# Altium PCB PCB1.PcbDoc
Units mil, origin at the board's own origin, x right, y up, seen from the top; angles counter-clockwise.
Board outline 2000 x 625 mil, 2 copper layers (Top SIGNAL, Bottom SIGNAL), stack 61.8 mil thick; 39 components, 37 nets, 177 pads, 39 vias.
Unrouted connection lines stored in the file: 3.
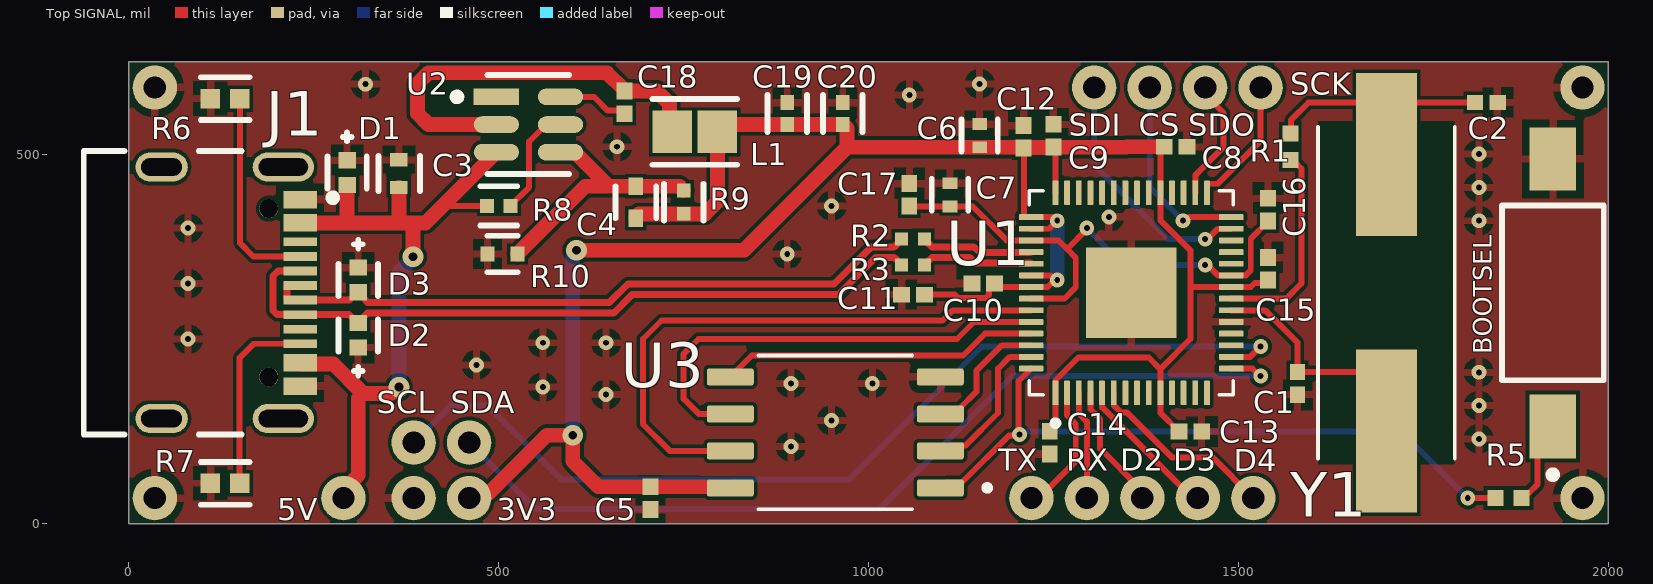
[diagram p0: Top SIGNAL view]
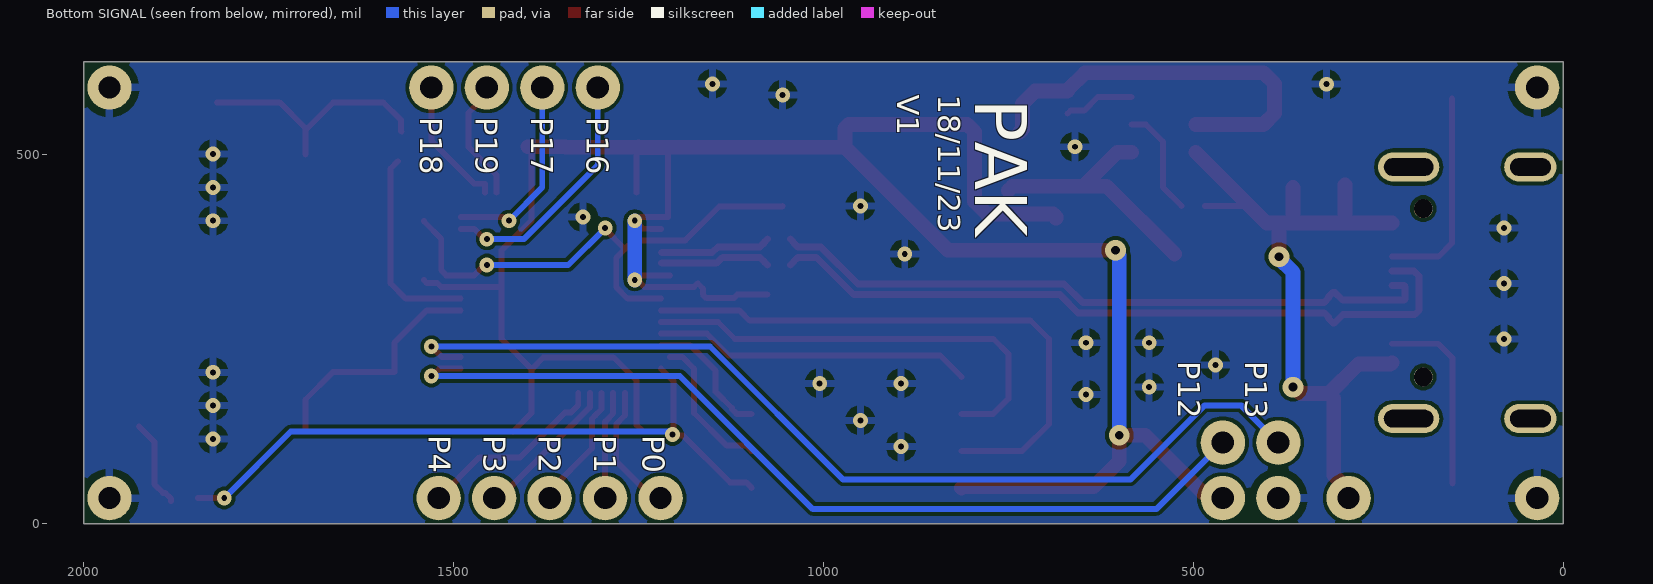
[diagram p1: Bottom SIGNAL view, seen from below]
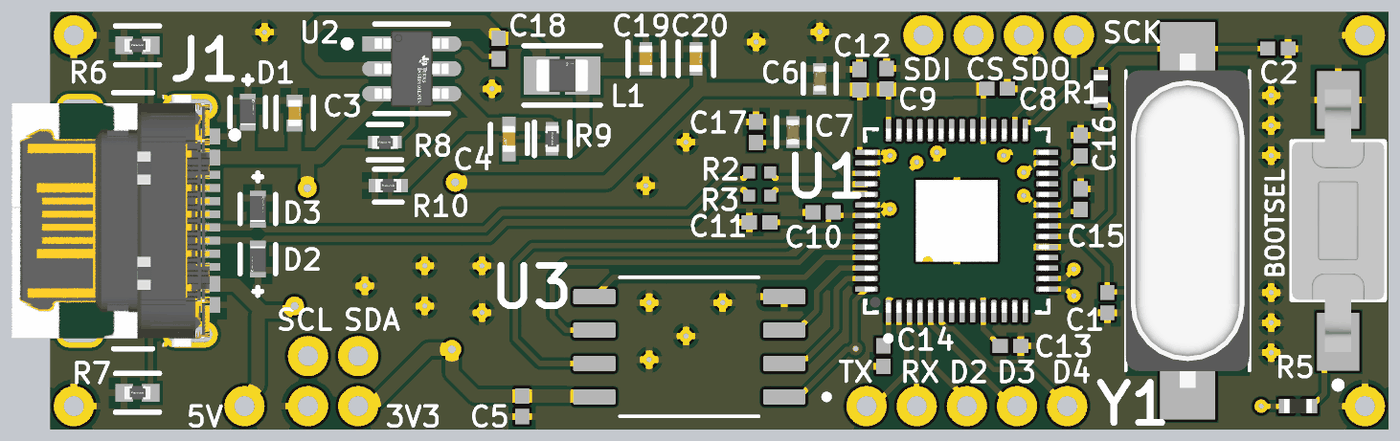
[diagram p2: 3D render of the assembled board from above, using the file's embedded part models]

## Layer stack, top to bottom
Top Solder: solder mask 0.4, Solder Resist, Dk 3.5
Top SIGNAL: signal copper 1.4
Dielectric 1: dielectric 59, FR-4, Dk 4.8
Bottom SIGNAL: signal copper 1.4
Bottom Solder: solder mask 0.4, Solder Resist, Dk 3.5

## Board outline
0,0 0,625 2000,625 2000,0

## Design rules (kind name [scope] priority, off if disabled: settings)
Clearance [All] p1: gap=5 ignorepadtopadclearanceinfootprint=FALSE except(0: Arc-Hole Track-Hole SMDPad-Hole THPad-Hole Via-Hole Fill-Hole Poly-Hole Region-Hole Text-Hole)
DiffPairsRouting [InDifferentialPair('DATA')] p1: maxlimit=5 minlimit=5 mostfreqgap=5 toplayer_minwidth=9.44 toplayer_maxwidth=9.44 toplayer_prefwidth=9.44 bottomlayer_minwidth=9.44 bottomlayer_maxwidth=9.44 bottomlayer_prefwidth=9.44 impedanceprofiledriven=TRUE impedanceprofileid={B98F284E-8DAC-4F89-B290-08390596F083} impedanceprofilevalue=90.000000 maxuncoupledlength=500
PolygonConnect [All] p1: connectstyle=Relief reliefconductorwidth=10 reliefentries=4 polygonreliefangle="90 Angle" airgapwidth=10
RoutingVias [All] p1: holewidth=28 width=50 viastyle="Through Hole" minholewidth=28 minwidth=50 maxholewidth=28 maxwidth=50
SolderMaskExpansion [All] p1: expansion=4 istentingtop=FALSE
Width [All] p1: maxlimit=25 minlimit=8 preferedwidth=13.75 minimp=50.000000 maximp=50.000000 favimp=50.000000
29 further rules are at their usual default settings.

## Classes and differential pairs
differential pair class DATA: DATA
component class Schematic: 3 BOOTSEL C1 C3 C5 C6 C7 C8 C9 C10 C11 C12 C13 C14 C15 C16 C17 D1 D2 D3 U1 U3 Y1
differential pair DATA: +DATA_P -DATA_N

## Components (designator, comment, footprint, x,y, rotation, side; value= is the part's Value field where it differs from the comment)
BOOTSEL "FSMSM" TECO-FSMSM-2_V 1925,312.5 r90 top (schematic designator SW1)
C1 "27pF" CAPC1005X55X25LL05T10 1580,190 r270 top
C2 "27pF" CAPC1005X55X25LL05T10 1835,570 r0 top
C3 "10uF" FP-GRM15-0_2-MFG 365,473.69 r90 top
C4 "56pF" FP-0402-L_1_0_1-W_0_5_0_1-MFG 685.32,435 r270 top
C5 "100nF" CAPC1005X56X25LL10T15 705,35 r270 top
C6 "1uF" FP-GRM15-0_1-MFG 1150,525 r90 top
C7 "1uF" FP-GRM15-0_1-MFG 1110,445 r90 top
C8 "100nF" CAPC1005X56X25LL10T15 1415,510 r0 top
C9 "100nF" CAPC1005X56X25LL10T15 1250,525 r90 top
C10 "100nF" CAPC1005X56X25LL10T15 1155,325 r180 top
C11 "100nF" CAPC1005X56X25LL10T15 1060,310 r180 top
C12 "100nF" CAPC1005X56X25LL10T15 1209.37,523.43 r90 top
C13 "100nF" CAPC1005X56X25LL10T15 1435,125 r0 top
C14 "100nF" CAPC1005X56X25LL10T15 1245,110 r270 top
C15 "100nF" CAPC1005X56X25LL10T15 1540,345 r90 top
C16 "100nF" CAPC1005X56X25LL10T15 1540,425 r90 top
C17 "100nF" CAPC1005X56X25LL10T15 1055,445 r90 top
C18 "100nF" CAPC1005X56X25LL10T15 670,570 r270 top
C19 "22uF" FP-CL746-IPC_C 890,555 r90 top
C20 "22uF" FP-CL746-IPC_C 965,555 r90 top
D1 "" FP-SLP1006P2-MFG 295,475 r270 top
D2 "" FP-SLP1006P2-MFG 310,255 r90 top
D3 "" FP-SLP1006P2-MFG 310,330 r270 top
J1 "USB4105-GF-A" FP-USB4105-GF-A-MFG 90,312.5 r270 top
L1 "15uH" FP-MLZ2012-1_25-IPC_B 765,530 r0 top
R1 "1K" RESC1005X40X25NL05T05 1570,510 r270 top
R2 "27R" RESC1005X40X25LL05T05 1060,385 r0 top
R3 "27R" RESC1005X40X25LL05T05 1060,350 r0 top
R5 "1K" RESC1005X40X25NL05T05 1865,35 r0 top
R6 "5K1" FP-ERJ2RK-IPC_A 130,575 r0 top
R7 "5K1" FP-ERJ2RK-IPC_A 130,55 r0 top
R8 "100K" FP-ERJ2RK-IPC_C 500,430 r0 top
R9 "100K" FP-ERJ2RK-IPC_C 750,435 r270 top
R10 "22K" FP-ERJ2RK-MFG 505,365 r0 top
U1 "RP2040" QFN40P700X700X90-57N 1355,312.5 r90 top
U2 "TPS54202DDCR" FP-DDC0006A-IPC_B 540,540 r0 top
U3 "W25Q128JVSIQ" SOIC127P790X216-8N 955,123.81 r180 top
Y1 "12MHz" XTAL_ABLS-12.000MHZ-B4-T 1700,312.5 r270 top

## Footprints (in the part's own frame and the unit in brackets; to place one, negate y for a bottom-side part, rotate by r counter-clockwise, add the part's x,y. Pads: shape width x height; smd on the part's side, far side on the other; paste and mask are expansions set on the pad)
CAPC1005X55X25LL05T10 [mm] "Chip Capacitor, 2-Leads, Body 1.00x0.50mm, IPC High Density"
  rect 0.56x0.52 smd: 1(-0.39,0) 2(0.39,0)
  body extent -0.53,-0.28 0.53,0.28, height 0.55
CAPC1005X56X25LL10T15 [mm] "Chip Capacitor, 2-Leads, Body 1.00x0.50mm, IPC High Density"
  rect 0.58x0.54 smd: 1(-0.39,0) 2(0.39,0)
  body extent -0.55,-0.3 0.55,0.3, height 0.56
FP-0402-L_1_0_1-W_0_5_0_1-MFG [mm]
  rect 0.6x0.5 smd paste+0 mask+0: 1(-0.55,0) 2(0.55,0)
  silkscreen extent -0.55,-0.7 0.55,0.7, body extent -0.95,-0.4 0.95,0.4, height 0.25
FP-CL746-IPC_C [mil]
  rect 20.29x18.6 smd paste+0 mask+0: 1(-14.9,0) 2(14.9,0)
  silkscreen extent -25,-27 25,27, body extent -29,-15 29,15, height 10
FP-DDC0006A-IPC_B [mm]
  rect 1.554x0.572 smd paste+0 mask+0: 1(-1.1,0.95)
  rrect100% 1.554x0.572 smd paste+0 mask+0: 2(-1.1,0) 3(-1.1,-0.95) 4(1.1,-0.95) 5(1.1,0) 6(1.1,0.95)
  silkscreen extent -2.57,-1.7 1.4,1.7, body extent -2.13,-1.7 2.13,1.7, height 0.25
FP-ERJ2RK-IPC_A [mil]
  rect 26.31x26.48 smd paste+0 mask+0: 1(-19.77,0) 2(19.77,0)
  silkscreen extent -33,-29 33,29, body extent -41,-21 41,21, height 10
FP-ERJ2RK-IPC_C [mil]
  rect 18.43x18.6 smd paste+0 mask+0: 1(-15.83,0) 2(15.83,0)
  silkscreen extent -25,-27 25,27, body extent -29,-15 29,15, height 10
FP-ERJ2RK-MFG [mm]
  rect 0.475x0.5 smd paste+0 mask+0: 1(-0.513,0) 2(0.513,0)
  silkscreen extent -0.53,-0.63 0.53,0.63, body extent -0.85,-0.38 0.85,0.38, height 0.25
FP-GRM15-0_1-MFG [mm]
  rect 0.4x0.5 smd paste+0 mask+0: 1(-0.4,0) 2(0.4,0)
  silkscreen extent -0.55,-0.63 0.55,0.63, body extent -0.5,-0.25 0.5,0.25, height 0.55
FP-GRM15-0_2-MFG [mm]
  rect 0.45x0.6 smd paste+0 mask+0: 1(-0.475,0) 2(0.475,0)
  silkscreen extent -0.6,-0.72 0.61,0.7, body extent -0.5,-0.25 0.5,0.25, height 0.7
FP-MLZ2012-1_25-IPC_B [mil]
  rect 53.32x57.33 smd paste+0 mask+0: 1(-30.55,0) 2(30.55,0)
  silkscreen extent -57,-44 57,44, body extent -67,-39 67,39, height 10
FP-SLP1006P2-MFG [mm]
  rect 0.55x0.6 smd paste+0 mask+0: 1(-0.425,0) 2(0.425,0)
  silkscreen extent -1.38,-0.67 0.55,0.67, body extent -0.8,-0.45 0.8,0.45, height 0.25
FP-USB4105-GF-A-MFG [mm]
  rrect100% 1x2.1 hole 1.7 slot 0.6 at 0 deg paste-2539.97 mask+0: 1(-4.32,3.015) 2(4.32,3.015)
  rrect100% 1x1.8 hole 1.4 slot 0.6 at 0 deg paste-2539.97 mask+0: 3(-4.32,-1.165) 4(4.32,-1.165)
  rect 0.6x1.15 smd paste+0 mask+0: A1-B12(-3.2,3.59) A4-B9(-2.4,3.59) B1-A12(3.2,3.59) B4-A9(2.4,3.59)
  rect 0.3x1.15 smd paste+0 mask+0: A5(-1.25,3.59) A6(-0.25,3.59) A7(0.25,3.59) A8(1.25,3.59) B5(1.75,3.59) B6(0.75,3.59) B7(-0.75,3.59) B8(-1.75,3.59)
  round 0.65 hole 0.65 unplated paste-2539.97 mask+0: ""(-2.89,2.515) ""(2.89,2.515)
  silkscreen extent -4.86,-3.84 4.86,4.84, body extent -4.96,-3.94 4.96,4.27, height 0.25
QFN40P700X700X90-57N [mm]
  rrect25% 0.84x0.2 smd: 1(-3.435,2.6) 2(-3.435,2.2) 3(-3.435,1.8) 4(-3.435,1.4) 5(-3.435,1) 6(-3.435,0.6) 7(-3.435,0.2) 8(-3.435,-0.2) 9(-3.435,-0.6) 10(-3.435,-1) 11(-3.435,-1.4) 12(-3.435,-1.8) 13(-3.435,-2.2) 14(-3.435,-2.6) 29(3.435,-2.6) 30(3.435,-2.2) 31(3.435,-1.8) 32(3.435,-1.4) 33(3.435,-1) 34(3.435,-0.6) 35(3.435,-0.2) 36(3.435,0.2) 37(3.435,0.6) 38(3.435,1) 39(3.435,1.4) 40(3.435,1.8) 41(3.435,2.2) 42(3.435,2.6)
  rrect25% 0.2x0.84 smd: 15(-2.6,-3.435) 16(-2.2,-3.435) 17(-1.8,-3.435) 18(-1.4,-3.435) 19(-1,-3.435) 20(-0.6,-3.435) 21(-0.2,-3.435) 22(0.2,-3.435) 23(0.6,-3.435) 24(1,-3.435) 25(1.4,-3.435) 26(1.8,-3.435) 27(2.2,-3.435) 28(2.6,-3.435) 43(2.6,3.435) 44(2.2,3.435) 45(1.8,3.435) 46(1.4,3.435) 47(1,3.435) 48(0.6,3.435) 49(0.2,3.435) 50(-0.2,3.435) 51(-0.6,3.435) 52(-1,3.435) 53(-1.4,3.435) 54(-1.8,3.435) 55(-2.2,3.435) 56(-2.6,3.435)
  rect 3.1x3.1 smd paste-0.57: 57(0,0)
  silkscreen extent -4.57,-3.5 3.5,3.5, body extent -3.5,-3.5 3.5,3.5, height 0.9
RESC1005X40X25LL05T05 [mm] "Chip Resistor, 2-Leads, Body 1.00x0.50mm, IPC High Density"
  rect 0.45x0.45 smd: 1(-0.4,0) 2(0.4,0)
  body extent -0.53,-0.27 0.53,0.28, height 0.4
RESC1005X40X25NL05T05 [mm] "Chip Resistor, 2-Leads, Body 1.05x0.55mm, IPC Medium Density"
  rect 0.55x0.55 smd: 1(-0.45,0) 2(0.45,0)
  body extent -0.53,-0.28 0.53,0.28, height 0.4
SOIC127P790X216-8N [mm]
  rrect25% 1.61x0.58 smd: 1(-3.605,1.905) 2(-3.605,0.635) 3(-3.605,-0.635) 4(-3.605,-1.905) 5(3.605,-1.905) 6(3.605,-0.635) 7(3.605,0.635) 8(3.605,1.905)
  silkscreen extent -5.32,-2.64 2.64,2.64
TECO-FSMSM-2_V [mm] "SMD, 2-Leads, Body 6x3.5mm, Pitch 9.19mm"
  rect 2.2x1.6 smd: 1(-4.595,0)
  rect 2.18x1.6 smd: 2(4.595,0)
  silkscreen extent -6.37,-1.75 3,1.75, body extent -4.98,-1.75 4.98,1.75, height 4.4
XTAL_ABLS-12.000MHZ-B4-T [mm]
  rect 5.6x2.1 smd: 1(-4.75,0) 2(4.75,0)
  silkscreen extent -5.7,-2.35 5.7,2.35, body extent -6.35,-2.35 6.35,2.35, height 4.06

## Part data
BOOTSEL: library part CMP-2000-07511-1, "FSMSM Push Button Switch, 50 mA, -35 to 85 degC, 2-Pin SMD, RoHS, Bulk", Case\/Package=SMD/SMT, Contact Current Rating=50mA, Contact Resistance=100mOhm, Manufacturer="TE Connectivity", Max Operating Temperature=85degC, Max Voltage Rating (DC)=12V, Min Operating Temperature=-35degC, Operating Force=180gf, Package Description="2-Pin Surface Mount Device, Body 6 x 3.5 mm, Pitch 9.19 mm", Package Quantity=1000, Voltage Rating (DC)=24V, Actuator Length=1.07mm, Actuator Material=Polyamide, Contact Material=Brass, Contact Plating=Silver, Current Rating=50mA, Datasheet URL=http://www.te.com/commerce/DocumentDelivery/DDEController?Action=showdoc&DocId=Customer+Drawing%7F1437566-3%7FC2%7Fpdf%7FEnglish%7FENG_CD_1437566-3_C2_1437566_3_1_c.dwg.pdf%7F1437566-3, Datasheet Version="Rev. C2, 08/2014", Electrical Life=20000Cycles, ELV=Compliant, Illumination Type=Illuminated, Lead Free=LeadFree, Manufacturer URL=http://www.te.com/, Mechanical Life=20000Cycles, Mount=SurfaceMount, Mounting Technology=SurfaceMount, Orientation=Straight, Package Reference=FSMSM, Packaging=LoosePiece, REACH SVHC=Unknown, RoHSCompliant=true, Switch Travel=0.25mm, Termination=GullWing, Throw Configuration=SPST
C1 C2: library part CMP-2008-03917-1, Manufacturer=Murata, Part Number=GRM1555C1H270JA01D
C3: library part CMP-06035-000074-1, "CAP CER 10UF 6.3V X6S 0402", Manufacturer=Murata, Manufacturer Part Number=GRM155C80J106ME11D, Package=GRM15-0.2, Temperature="-55°C to +105°C", Temperature Characteristic=X6S, Temperature Coefficient=22%, Temperature Range High=+105°C, Temperature Range Low=-55°C, Tolerance=20%, Voltage Rating=6.3V, Automotive=No, Capacitance=10uF, Category=Cap, ComponentLink2Description=Datasheet, ComponentLink2URL=https://search.murata.co.jp/Ceramy/image/img/A01X/G101/ENG/GRM155C80J106ME11-01.pdf, Device Class L1="Passive Components", Device Class L2=Capacitors, Device Class L3="Ceramic Capacitors", Digikey Description="CAP CER 10UF 6.3V X6S 0402", Height=0.7mm, Ipc Land Pattern Name=CAPC10050X50, Lead Free=Yes, Material=Ceramic, Mouser Description="Cap Ceramic 10uF 6.3V X6S 20% Pad SMD 0402 105C T/R", Octopart=https://octopart.com/grm155c80j106me11d-murata-71220993, RoHS=TRUE
C4: library part CMP-2008-02663-2, "General Purpose Ceramic Capacitor, 0402, 56pF, 5%, C0G, 30ppm/°C, 50V", Case Code (Imperial)=0402, Case Code (Metric)=1005, Dielectric=C0G, Dielectric Material=Ceramic, Max Operating Temperature=125°C, Min Operating Temperature=-55°C, Package Quantity=1, Temperature Coefficient=0ppm/°C, Tolerance=5%, Voltage=50V, Capacitance=56pF, Case/Package=0402, Construction=Flat, Contact Plating=Tin, Depth=0.5mm, Height=0.5mm, Lead Free="Lead Free", Length=1mm, Mount="Surface Mount", Number of Pins=2, Packaging="Tape and Reel", Radiation Hardening=No, REACH SVHC="No SVHC", RoHS Compliant=Yes, Series=-, Termination=SMD/SMT, Thickness=0.022inch, Voltage Rating=50V, Voltage Rating (DC)=50V, Width=0.02inch
C5 C8 C9 C10 C11 C12 C13 C14 C15 C16 C17 C18: library part CMP-2008-02743-1, Manufacturer="AVX Interconnect / Elco", Part Number=04026D104KAT2A
C6 C7: library part CMP-2008-04556-2, "CAP CER 1UF 10V X5R 0402", Manufacturer=Murata, Manufacturer Part Number=GRM155R61A105KE15D, Package=GRM15-0.1, Temperature="-55°C to +85°C", Temperature Characteristic=X5R, Temperature Coefficient=15%, Temperature Range High=+85°C, Temperature Range Low=-55°C, Tolerance=10%, Voltage Rating=10V, Automotive=No, Capacitance=1uF, Category=Cap, ComponentLink2Description=Datasheet, ComponentLink2URL=https://search.murata.co.jp/Ceramy/image/img/A01X/G101/ENG/GRM155R61A105KE15-01A.pdf, Device Class L1="Passive Components", Device Class L2=Capacitors, Device Class L3="Ceramic Capacitors", Digikey Description="CAP CER 1UF 10V X5R 0402", Height=0.55mm, Ipc Land Pattern Name=CAPC10050X50, Lead Free=Yes, Material=Ceramic, Mouser Description="0402 1 uF 10 V ±10% Tolerance X5R Surface Mount Multilayer Ceramic Capacitor", Octopart=https://octopart.com/grm155r61a105ke15d-murata-197442, RoHS=TRUE
C19 C20: library part CMP-13271-000286-1, "Cap Ceramic 22uF 6.3V X5R ±20% SMD 0402 +85°C Paper T/R", Case Code (Imperial)=0402, Case Code (Metric)=1005, Max Operating Temperature=85°C, Min Operating Temperature=-55°C, Tolerance=20%, Voltage Rating=6.3V, Capacitance=22uF, Case/Package=0402, Length=0.039inch, Mount="Surface Mount", Packaging="Tape and Reel", Thickness=0.022inch, Width=0.02inch
D1 D2 D3: library part CMP-56445-000005-1, "TVS DIODE 33VWM 60VC SLP1006P2", Case Code (Imperial)=0402, Case Code (Metric)=1006, Case/Package=SMD/SMT, Clamping Voltage=60V, Leakage Current=1uA, Max Breakdown Voltage=45V, Max Operating Temperature=125°C, Min Breakdown Voltage=36V, Min Operating Temperature=-40°C, Peak Pulse Current=2A, Peak Pulse Power=125W, Power Dissipation=170W, Power Line Protection=No, Resistor Type=Zener, Reverse Standoff Voltage=33V, Clamping Voltage-Max=60V, Depth=0.6mm, Diode Type=ZENER, Direction=Unidirectional, Element Configuration=Single, Lead Free="Lead Free", Length=1mm, Mount="Surface Mount", Number of Pins=2, Number of Unidirectional Channels=1, Packaging="Tape and Reel", Radiation Hardening=No, RoHS Compliant=Yes, Series="Automotive, AEC-Q100, uClamp®", Working Voltage=33V
J1: library part CMP-245163-000001-1, "CONN RCPT USB2.0 TYPEC 5A", Current Rating=5/6.25/1.25/0.25A, Manufacturer=GCT, Package=0, Temperature="-40°C to +85°C", Temperature Range High=+85°C, Temperature Range Low=-40°C, Voltage Rating=20V, Automotive=No, Category=Conn, ComponentLink2Description=Datasheet, ComponentLink2URL=https://gct.co/files/drawings/usb4105.pdf, Conn Orientation="Right Angle", Contact Material=Gold,Nickel, Device Class L1=Connectors, Device Class L2="USB Connectors", Device Class L3=unset, Digikey Description="CONN RCPT USB2.0 TYPEC 5A", Height=3.46mm, Is Female=yes, Lead Free=Yes, Manufacturer Part Number=USB4105-GF-A, Number of Contacts=16, Octopart=https://octopart.com/usb4105-gf-a-gct-106627878, RoHS=TRUE, USB Standard="USB 2.0"
L1: library part CMP-08253-000108-1, "Shielded Multilayer Inductor 15uH ±20% 350mA 611mΩ SMD 0805", Case Code (Imperial)=0805, Case Code (Metric)=2012, Current Rating=350mA, DC Resistance (DCR)=611mR, Max Operating Temperature=125°C, Min Operating Temperature=-55°C, Package Quantity=1, Saturation Current=90mA, Self Resonant Frequency=40MHz, Test Frequency=2MHz, Tolerance=20%, Case/Package=0805, Core Material=Ferrite, Height - Seated (Max)=0.057inch, Inductance=15uH, Length=0.079inch, Mount="Surface Mount", Packaging="Tape and Reel", RoHS Compliant=Yes, Shielding=Shielded, Width=0.049inch
R1 R5: library part CMP-1011-00510-4, "Chip Resistor, 1 KOhm, +/- 1%, 100 mW, -55 to 155 degC, 0402 (1005 Metric), RoHS, Tape and Reel", Case Code (Imperial)=0402, Case Code (Metric)=1005, Manufacturer="Basic Passives", Max Operating Temperature="155 degC", Min Operating Temperature="-55 degC", Package Quantity=10000, PartNumber=ERJ-2RKF1001X, Power Rating="100 mW", Resistance="1 KOhm", Tolerance=1%, Voltage Rating="50 V", Case\/Package=0402, ComponentLink1Description="Manufacturer URL", ComponentLink1URL=http://www.panasonic.com/, ComponentLink2Description=Datasheet, ComponentLink2URL=http://industrial.panasonic.com/cdbs/www-data/pdf/RDA0000/AOA0000C86.pdf, DatasheetVersion=04/2015, Height="0.35 mm", Length="1 mm", Mount="Surface Mount", Mounting Technology="Surface Mount", PackageDescription="2-Pin Surface Mount Device, Body 1 x 0.5 mm", PackageReference=0402, Packaging="Tape and Reel", Pins=2, Radiation Hardening=No, REACH SVHC=Yes, RoHSCompliant=true, Width="0.5 mm"
R2 R3: library part CMP-2002-00498-1, Manufacturer=Panasonic, Part Number=ERJ-2GEJ270X
R6 R7: library part CMP-2002-01158-2, "RES SMD 5.1K OHM 1% 1/10W 0402", Case Code (Imperial)=0402, Case Code (Metric)=1005, Max Operating Temperature=155°C, Max Power Dissipation=100mW, Min Operating Temperature=-55°C, Package Quantity=10000, Resistance=5.1kR, Resistance Tolerance=1%, Resistor Type="Thick Film", Temperature Coefficient=100ppm/°C, Voltage Rating=50V, Case/Package=0402, Construction=Rectangular, Contact Plating=Tin, Depth=0.5mm, Height=0.35mm, Lead Free="Lead Free", Length=1mm, Military Standard=Not, Mount="Surface Mount", Number of Terminations=2, Packaging="Tape and Reel", Power Rating=100mW, REACH SVHC="No SVHC", RoHS Compliant=Yes, Series=ERJ, Technology="THICK FILM", Termination=SMD/SMT, Tolerance=1%, Voltage Rating (DC)=50V, Weight=2.8E-05oz, Width=0.5mm
R8 R9: library part CMP-2002-00608-4, "RES SMD 100K OHM 1% 1/10W 0402", Case Code (Imperial)=0402, Case Code (Metric)=1005, Max Operating Temperature=155°C, Max Power Dissipation=100mW, Min Operating Temperature=-55°C, Package Quantity=1, Resistance=100kR, Temperature Coefficient=100ppm/°C, Tolerance=1%, Voltage Rating=50V, Case/Package=0402, Composition="Thick Film", Contact Plating=Tin, Depth=0.5mm, Features="Automotive AEC-Q200", Height=0.35mm, Lead Free="Lead Free", Length=1mm, Military Standard=Not, Mount="Surface Mount", Number of Pins=2, Number of Terminations=2, Packaging="Tape and Reel", Power Rating=100mW, Radiation Hardening=No, REACH SVHC="No SVHC", Termination=SMD/SMT, Voltage Rating (DC)=50V, Width=0.5mm
R10: library part CMP-2002-01133-2, "RES SMD 22K OHM 1% 1/10W 0402", Case Code (Imperial)=0402, Case Code (Metric)=1005, Max Operating Temperature=155°C, Max Power Dissipation=100mW, Min Operating Temperature=-55°C, Package Quantity=10000, Resistance=22kR, Temperature Coefficient=100ppm/°C, Tolerance=1%, Voltage Rating=50V, Case/Package=0402, Composition="Thick Film", Contact Plating=Tin, Depth=0.5mm, Height=0.35mm, Lead Free="Lead Free", Length=1mm, Military Standard=Not, Mount="Surface Mount", Number of Pins=2, Number of Terminations=2, Packaging="Tape and Reel", Power Rating=100mW, Radiation Hardening=No, REACH SVHC="No SVHC", Termination=SMD/SMT, Voltage Rating (DC)=50V, Width=0.02inch
U1: "RP2040 chip for Raspberry Pi Pico - ARMÂ® CortexÂ®-M0+ MCU 32-Bit", Package=None, Availability="In Stock", Check_prices=https://www.snapeda.com/parts/RP2040/Raspberry+Pi/view-part/?ref=eda, MF="Raspberry Pi", MP=RP2040, Price=None, Purchase-URL=https://pricing.snapeda.com/search/part/RP2040/?ref=eda, SnapEDA_Link=https://www.snapeda.com/parts/RP2040/Raspberry+Pi/view-part/?ref=snap
U2: library part CMP-04918-000439-1, "IC REG BUCK ADJ 2A TSOT23-6", Case/Package=SOT-23-6, Max Input Voltage=28V, Max Operating Temperature=125°C, Min Input Voltage=4.5V, Min Operating Temperature=-40°C, Min Output Voltage=596mV, Output Current=2A, Quiescent Current=40uA, Switching Frequency=500kHz, Lead Free="Lead Free", Max Output Voltage=28V, Mount="Surface Mount", Number of Outputs=1, Output Configuration=Positive, Output Type=Adjustable, Packaging="Tape and Reel", RoHS Compliant=Yes, Synchronous Rectifier=Yes
U3: "FLASH - NOR Memory IC 128Mb (16M x 8) SPI - Quad I/O, QPI, DTR 133 MHz 8-SOIC", Package="SOIC-8 Winbond", Availability="In Stock", Check_prices=https://www.snapeda.com/parts/W25Q128JVSIQ/Winbond+Electronics/view-part/?ref=eda, MF="Winbond Electronics", MP=W25Q128JVSIQ, Price=None, Purchase-URL=https://pricing.snapeda.com/search/part/W25Q128JVSIQ/?ref=eda, SnapEDA_Link=https://www.snapeda.com/parts/W25Q128JVSIQ/Winbond+Electronics/view-part/?ref=snap
Y1: library part ABLS-12.000MHZ-B4-T, "HC/49US (AT49) SMD LOW PROFILE CRYSTAL", Package="HC-49/US Abracon LLC", Availability="In Stock", Check_prices=https://www.snapeda.com/parts/ABLS-12.000MHZ-B4-T/Abracon+LLC/view-part/?ref=eda, MF="Abracon LLC", MP=ABLS-12.000MHZ-B4-T, Price=None, Purchase-URL=https://pricing.snapeda.com/search/part/ABLS-12.000MHZ-B4-T/?ref=eda, SnapEDA_Link=https://www.snapeda.com/parts/ABLS-12.000MHZ-B4-T/Abracon+LLC/view-part/?ref=snap

## Free pads (board coordinates)
  round 60 hole 30: 7(1965,590) 9(35,35) 10(35,590) 11(1965,35) 12(1305,590) 13(1380,590) 14(1455,590) 15(290,35) 16(385,35) 17(460,35) 18(385,110) 19(460,110) 20(1530,590) 21(1220,35) 22(1295,35) 23(1370,35) 24(1445,35) 25(1520,35)

## Via types
v1: diameter 20, hole 8, Top SIGNAL to Bottom SIGNAL, 35 vias
v2: diameter 28, hole 12, Top SIGNAL to Bottom SIGNAL, 4 vias

## Nets (pads, with @x,y where several pads share a name; then routed paths per layer and width w, separated by ;. In a path a pad name is that pad's centre, name@x,y a point inside that pad or via, vN(x,y) a via of type N, cw(c..) or ccw(c..) an arc to the next point about the centre after c; other vN are vias at no path point)
1V1: C7.1 C16.1 C17.1 U1.23 U1.45 U1.50 | length 727.2
  Top SIGNAL w8: C17.1 1055.39,429.25 C7.1 1140.75,429.25 1186.63,383.37 U1.45 1219.83,383.3 1256.7,383.3 1268.35,371.65 ; U1.50 1219.83,304.69 1264.69,304.69 1280,320 1280,360 1268.35,371.65 ; v1(1295,400) 1295,398.3 1268.35,371.65 ; v1(1455,350) 1458.25,350 1472.06,336.18 1490.17,336.18 U1.23 1490.3,336.18 1509.92,336.18 1516.61,342.88 1516.61,385.47 1540,408.86 C16.1
  Bottom SIGNAL w8: v1(1295,400) 1345,350 v1(1455,350)
3V3: C4.2 C5.1 C6.1 C8.1 C9.1 C10.1 C11.1 C12.1 C13.1 C14.1 C15.1 C19.1 C20.1 L1.2 pad.17 R9.2 U1.1 U1.10 U1.22 U1.33 U1.42 U1.43 U1.44 U1.48 U1.49 U3.8 | length 3304.2
  Top SIGNAL w8: C11.1 1116.47,310 1121.1,305.37 1158.25,305.37 1162.94,310.06 1162.94,318.37 1169.57,325 C10.1 1174.92,320.44 1242.19,320.44 v1@1251.75,330 ; U1.48@1207.29,336.12 U1.48 U1.48 1245.69,336.06 v1@1251.75,330 ; C12.1@1209.96,508.9 1209.96,414.93 1210.02,414.86 U1.43 1219.83,414.8 1250.2,414.8 v1(1255,410) 1244.11,399.11 U1.44@1232.84,399.11 ; U1.44@1219.76,398.95 U1.44@1232.84,398.95 ; C14.1 1245,126.14 1252.64,133.78 1252.64,194.14 1283.5,225 1378.74,225 1394.37,209.37 ; U1.42 C9.1@1252.64,507.01 ; v1(1255,330) v1@1251.75,330 ; C8.1 1399.47,510.18 1399.29,510 1394.65,505.35 1394.65,460.48 1394.37,460.21 U1.33 U1.33 1394.43,410.57 1435,370 1435,320.31 ; C13.1 1394.37,150.28 U1.10 1394.37,209.37 ; C15.1 1536.25,325.89 1522.06,325.89 1516.6,320.44 1490.3,320.44 U1.22 1490.17,320.31 1435,320.31 ; 1394.37,209.37 1435,250 1435,320.31
  Top SIGNAL w20: pad.17 467.65,42.65 487.65,42.65 565,120 v2(600,120) 600,85 634.65,50.35 C5.1 771.52,50.35 771.65,50.23 811.65,50.23 U3.8 ; v2(605,370) 831.5,370 970.75,509.25 ; C4.2 685.32,415 689.48,419.17 R9.2 779.17,419.17 795.55,435.55 L1.2 805.64,540.1 C19.1 965.55,540.1 970.75,534.9 970.75,509.25 ; C12.1@1208.74,509.25 C6.1 970.75,509.25 ; C12.1@1210,508.86 1249.37,508.86 C9.1@1250,509.49 ; C9.1@1250.35,509.29 1348.23,509.29 1348.94,510 C8.1@1399.29,510
  Bottom SIGNAL w20: v2(600,120) 600,362.84 605,367.84 v2(605,370) ; v1(1255,330) v1(1255,410)
5V: C3.1 D1.2 J1.A4-B9 J1.B4-A9 pad.15 R8.1 U2.3 | length 1000.9
  Top SIGNAL w8: 424.08,430 R8.1
  Top SIGNAL w10: 366.77,406.99 366.99,407.2
  Top SIGNAL w20: J1.B4-A9 233.15,216.2 276.66,216.2 316.43,176.43 ; J1.A4-B9 290.69,406.99 ; pad.15 290,45.82 310,65.82 310,167.86 ; D1.2 295,411.3 290.69,406.99 ; 310,170 316.43,176.43 ; v2(365,185) 362.84,185 354.26,176.43 316.43,176.43 ; C3.1 365,406.99 ; v2(384,361.22) 384,406.99 ; U2.3 424.08,430 401.07,406.99 384,406.99 ; 290.69,406.99 365,406.99 ; 365,406.99 366.77,406.99 384,406.99
  Bottom SIGNAL w20: v2(365,185) 365,340.06 384,359.06 v2(384,361.22)
ADC0: U1.38
BOOT: C18.2 U2.6 | length 96.1
  Top SIGNAL w8: U2.6 628.7,577.4 647.37,558.73 665.92,558.73 C18.2
D2: pad.23 U1.4 | length 171.3
  Top SIGNAL w8: U1.4 1299.88,155.12 1308.19,146.81 1313.01,141.99 1313.01,101.99 1370,45 pad.23
D3: pad.24 U1.5 | length 199.7
  Top SIGNAL w8: U1.5 1315.69,177.2 1315.69,157.69 1321.19,152.2 1334.65,138.73 1438.38,35 pad.24
D4: pad.25 U1.6 | length 257.4
  Top SIGNAL w8: U1.6 1331.38,160.39 1340.88,150.89 1349.11,150.89 1410,90 1465,90 pad.25
D5: U1.7
D6: U1.8
D7: U1.9
DATA_N: D3.2 J1.A6 J1.A7 R2.1 R2.2 U1.46 | length 1065
  Top SIGNAL w9.44: J1.A6 214.61,322.34 213.42,321.16 213.42,303.84 214.61,302.66 298.41,302.66 309.02,313.27 310.98,313.27 317.09,307.16 317.09,305.25 322.62,299.72 649.72,299.72 674.44,324.44 953.22,324.44 1003.51,374.72 1034.58,374.72 1040.11,380.25 1040.11,380.86 R2.1 ; R2.2 1079.89,380.86 1079.89,380.25 1085.42,374.72 1142.64,374.72 1150.4,366.96 U1.46@1219.11,366.96
DATA_P: D2.2 J1.B6 J1.B7 R3.1 R3.2 U1.47 | length 1135.6
  Top SIGNAL w9.44: J1.B7 231.15,341.84 201.84,341.84 195,335 195,288.5 200.53,282.97 J1.B6 297.78,282.97 309.02,271.73 310.98,271.73 317.09,277.84 317.09,279.75 322.62,285.28 655.7,285.28 680.42,310 959.2,310 1009.49,360.28 1034.58,360.28 1040.11,354.75 1040.11,354.14 R3.1 ; R3.2 1079.89,354.14 1079.89,354.75 1085.42,360.28 1136.66,360.28 1144.42,352.53 U1.47@1219.11,352.53
EN: R8.2 U2.5 | length 149.3
  Top SIGNAL w8: R8.2 515.83,430.08 541.13,455.38 541.13,517.14 563.98,540 U2.5
FB: C4.1 R9.1 R10.2 U2.4 | length 349.5
  Top SIGNAL w20: R10.2 616.83,456.65 648.6,456.65 ; U2.4 602.65,502.6 648.6,456.65 ; R9.1 744.18,456.65 C4.1 648.6,456.65
GND: BOOTSEL.2 C1.2 C2.2 C3.2 C5.2 C6.2 C7.2 C8.2 C9.2 C10.2 C11.2 C12.2 C13.2 C14.2 C15.2 C16.2 C17.2 C19.2 C20.2 D1.1 D2.1 D3.1 J1.A1-B12 J1.B1-A12 pad.7 pad.9 pad.10 pad.11 pad.16 R6.1 R7.1 R10.1 U1.19 U1.57 U2.1 U3.4
  other v1: 895,104.58 1825,115 950,140 1825,160 645,175 559.58,185 895,190 1005,190 1825,205 470,215 559.58,245 645,245 80,250 80,325 890,365 80,400 1825,410 1325,415 950,430 1825,455 1825,500 660,510 1055,580 320,594.58 1150,595
I2C_SCL: pad.18 U1.16 | length 1327.3
  Top SIGNAL w8: U1.16 1515.89,225.89 v1(1530,240)
  Bottom SIGNAL w8: pad.18 435,160 485,160 585,60 973.22,60 1153.22,240 v1(1530,240)
I2C_SDA: pad.19 U1.15 | length 1225.8
  Top SIGNAL w8: U1.15 1518.77,210.14 1528.91,200 v1(1530,200)
  Bottom SIGNAL w8: pad.19 550,20 1014.15,20 1194.15,200 v1(1530,200)
NetBOOTSEL_1: BOOTSEL.1 R5.2 | length 120.1
  Top SIGNAL w8: R5.2@1881.81,31.14 1881.81,34.09 1889.54,41.83 1892.5,41.83 1904.39,53.72 1904.39,110.98 BOOTSEL.1
NetC2_1: C2.1 R1.1 Y1.1 | length 339.7
  Top SIGNAL w8: R1.1@1570,530.67 1570.86,531.53 1570.86,545.86 1594.83,569.83 1662.66,569.83 Y1.1@1700,532.49 ; Y1.1 1700,535 1735,570 C2.1
NetJ1_A5: J1.A5 R6.2 | length 283.9
  Top SIGNAL w8: R6.2@150,575 150,380 168.29,361.71 J1.A5
NetJ1_B5: J1.B5 R7.2 | length 259.1
  Top SIGNAL w8: R7.2 149.77,224.77 168.6,243.6 J1.B5
QSPI_CLK: U1.52 U3.6 | length 620
  Top SIGNAL w8: U3.6 770.3,148.81 750,169.11 750,230 770,250 1119.36,250 1142.49,273.13 U1.52
QSPI_CS: R5.1 U1.56 U3.1 | length 913
  Top SIGNAL w8: U3.1 1104.35,56.23 1126.23,56.23 1189.89,119.89 1202.67,119.89 1202.67,193.04 U1.56 ; v1(1810,35) R5.1@1845.39,35
  Bottom SIGNAL w8: v1(1203.84,121.06) 1207.77,125 1720,125 v1(1810,35)
QSPI_D0: U1.53 U3.5 | length 431
  Top SIGNAL w8: U3.5 842.01,227.74 1127.74,227.74 1157.38,257.38 U1.53
QSPI_D1: U1.55 U3.2 | length 198.1
  Top SIGNAL w8: U3.2 1104.35,106.23 1131.23,106.23 1175,150 1175,210 1190.89,225.89 U1.55@1207.23,225.89
QSPI_D2: U1.54 U3.3 | length 178.8
  Top SIGNAL w8: U3.3 1117.2,148.81 1123.62,155.23 1123.62,156.82 1145.58,178.78 1145.58,207.11 1180.11,241.63 U1.54
QSPI_D3: U1.51 U3.7 | length 788.9
  Top SIGNAL w8: U3.7 731.19,98.81 695,135 695,250 720,275 1100,275 1113.88,288.88 U1.51
SPI_CS: pad.13 U1.28 | length 265.9
  Top SIGNAL w8: v1(1425,410) 1428.25,410 1433.11,414.86 U1.28
  Bottom SIGNAL w8: pad.13 1380,455 v1(1425,410)
SPI_MISO: pad.12 U1.27 | length 337.5
  Top SIGNAL w8: v1(1455,385) 1458.01,385 1472.06,399.05 U1.27 U1.27
  Bottom SIGNAL w8: pad.12 1305,485 1405,385 v1(1455,385)
SPI_MOSI: pad.14 U1.30 | length 168.5
  Top SIGNAL w8: U1.30 1441.61,471.61 1480,510 1480,555.6 1455,580.6 pad.14
SPI_SCK: pad.20 U1.29 | length 180.9
  Top SIGNAL w8: U1.29 1457.36,459.94 1457.43,460 1471.96,460 1530,518.04 pad.20
SW: C18.1 L1.1 U2.2 | length 557.5
  Top SIGNAL w20: U2.2 405,540 390,555 390,595 405,610 646.14,610 669.37,586.77 669.37,585.98 C18.1 713.79,585.35 730.64,568.51 730.64,533.81 L1.1
UART_RX: pad.22 U1.3 | length 146.8
  Top SIGNAL w8: U1.3 1284.13,149.25 1295,138.38 pad.22
UART_TX: pad.21 U1.2 | length 177.8
  Top SIGNAL w8: pad.21 1230,35 1280,85 1280,135 1268.39,146.61 U1.2
XIN: C1.1 U1.20 Y1.2 | length 419.1
  Top SIGNAL w8: U1.20 1536.12,288.88 1580,245 C1.1 ; C1.1@1580,205.71 Y1.2@1662.66,205.71 ; Y1.2 Y1.2@1700,168.37 ; Y1.2@1700,127.99 Y1.2@1700,168.37 ; Y1.2@1662.66,205.71 Y1.2@1700,168.37 ; Y1.2@1662.66,205.71 Y1.2@1700,168.37
XOUT: R1.2 U1.21 | length 272.9
  Top SIGNAL w8: U1.21 1564.63,304.63 1585,325 1585,480.61 1575.22,490.39 R1.2@1575,490.39
pads on no net: J1. J1.1 J1.2 J1.3 J1.4 J1.A8 J1.B8 U1.11 U1.12 U1.13 U1.14 U1.17 U1.18 U1.24 U1.25 U1.26 U1.31 U1.32 U1.34 U1.35 U1.36 U1.37 U1.39 U1.40 U1.41

## Polygon pours and split planes (outlines as drawn)
GND on Bottom SIGNAL "GND_L02_P002" (solid, pour order 2): 0,625 2000,625 2000,0 0,0
GND on Top SIGNAL "GND_L01_P001" (solid, pour order 1): 0,625 2000,625 2000,0 0,0

## Other copper
Top SIGNAL:
  pour cut-out: 1607.48,545 1792.52,545 1792.52,80 1607.48,80

## Silkscreen, mask and mechanical layers (free items; w line width, h text height)
Top Overlay:
  text "SCK" at 1570,580 h30
  text "SDI" at 1270.75,524.58 h30
  text "CS" at 1365,525 h30
  text "SDO" at 1432.24,525 h30
  text "SCL" at 335,150 h30
  text "SDA" at 435,150 h30
  text "TX" at 1175,72 h30
  text "RX" at 1266.98,71.98 h30
  text "D2" at 1340,71.7 h30
  text "D3" at 1411.7,71.69 h30
  text "D4" at 1493.48,71.52 h30
  text "5V" at 200.3,5 h30
  text "3V3" at 497.6,5 h30
Bottom Overlay:
  text "18/11/23" at 845,580 h30 r90
  text "V1" at 900,580 h30 r90
  text "PAK" at 795,575 h70 r90
  text "P16" at 1320,550 h30 r90
  text "P17" at 1395,550 h30 r90
  text "P19" at 1470,550 h30 r90
  text "P18" at 1545,550 h30 r90
  text "P13" at 430,220 h30 r90
  text "P12" at 520,220 h30 r90
  text "P0" at 1244.19,120 h30 r90
  text "P1" at 1310,120 h30 r90
  text "P2" at 1384.83,120 h30 r90
  text "P3" at 1458.89,120 h30 r90
  text "P4" at 1533.59,120 h30 r90